# Altium PCB blood pressure.PcbDoc
Units mm, origin at the board's own origin, x right, y up, seen from the top; angles counter-clockwise.
Board outline 80.01 x 100.08 mm, 2 copper layers (Top Layer, Bottom Layer); 44 components, 39 nets, 174 pads, 24 vias.
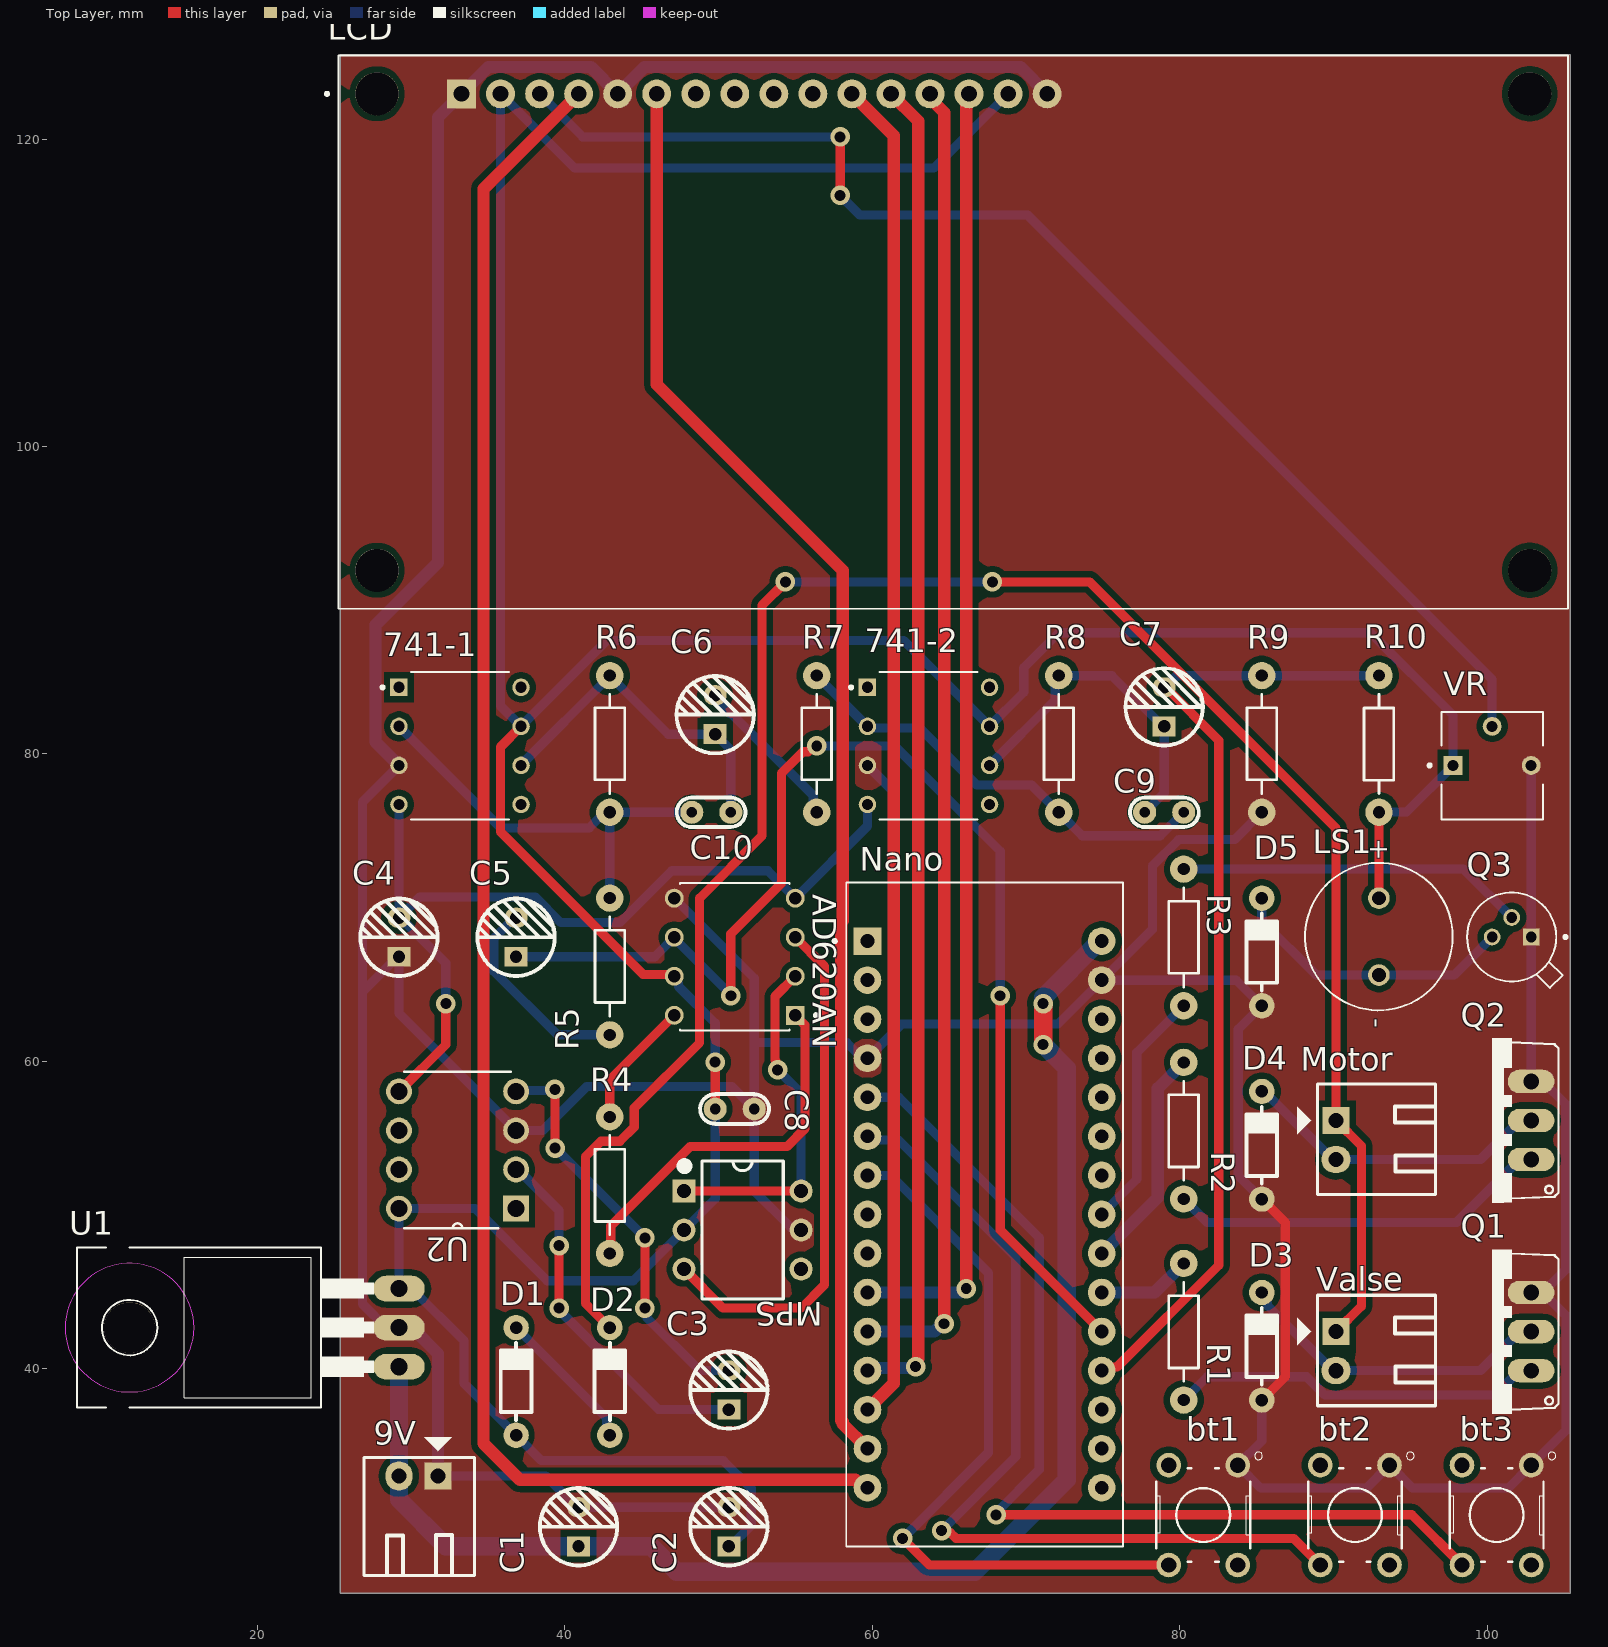
[diagram p0: Top Layer view]
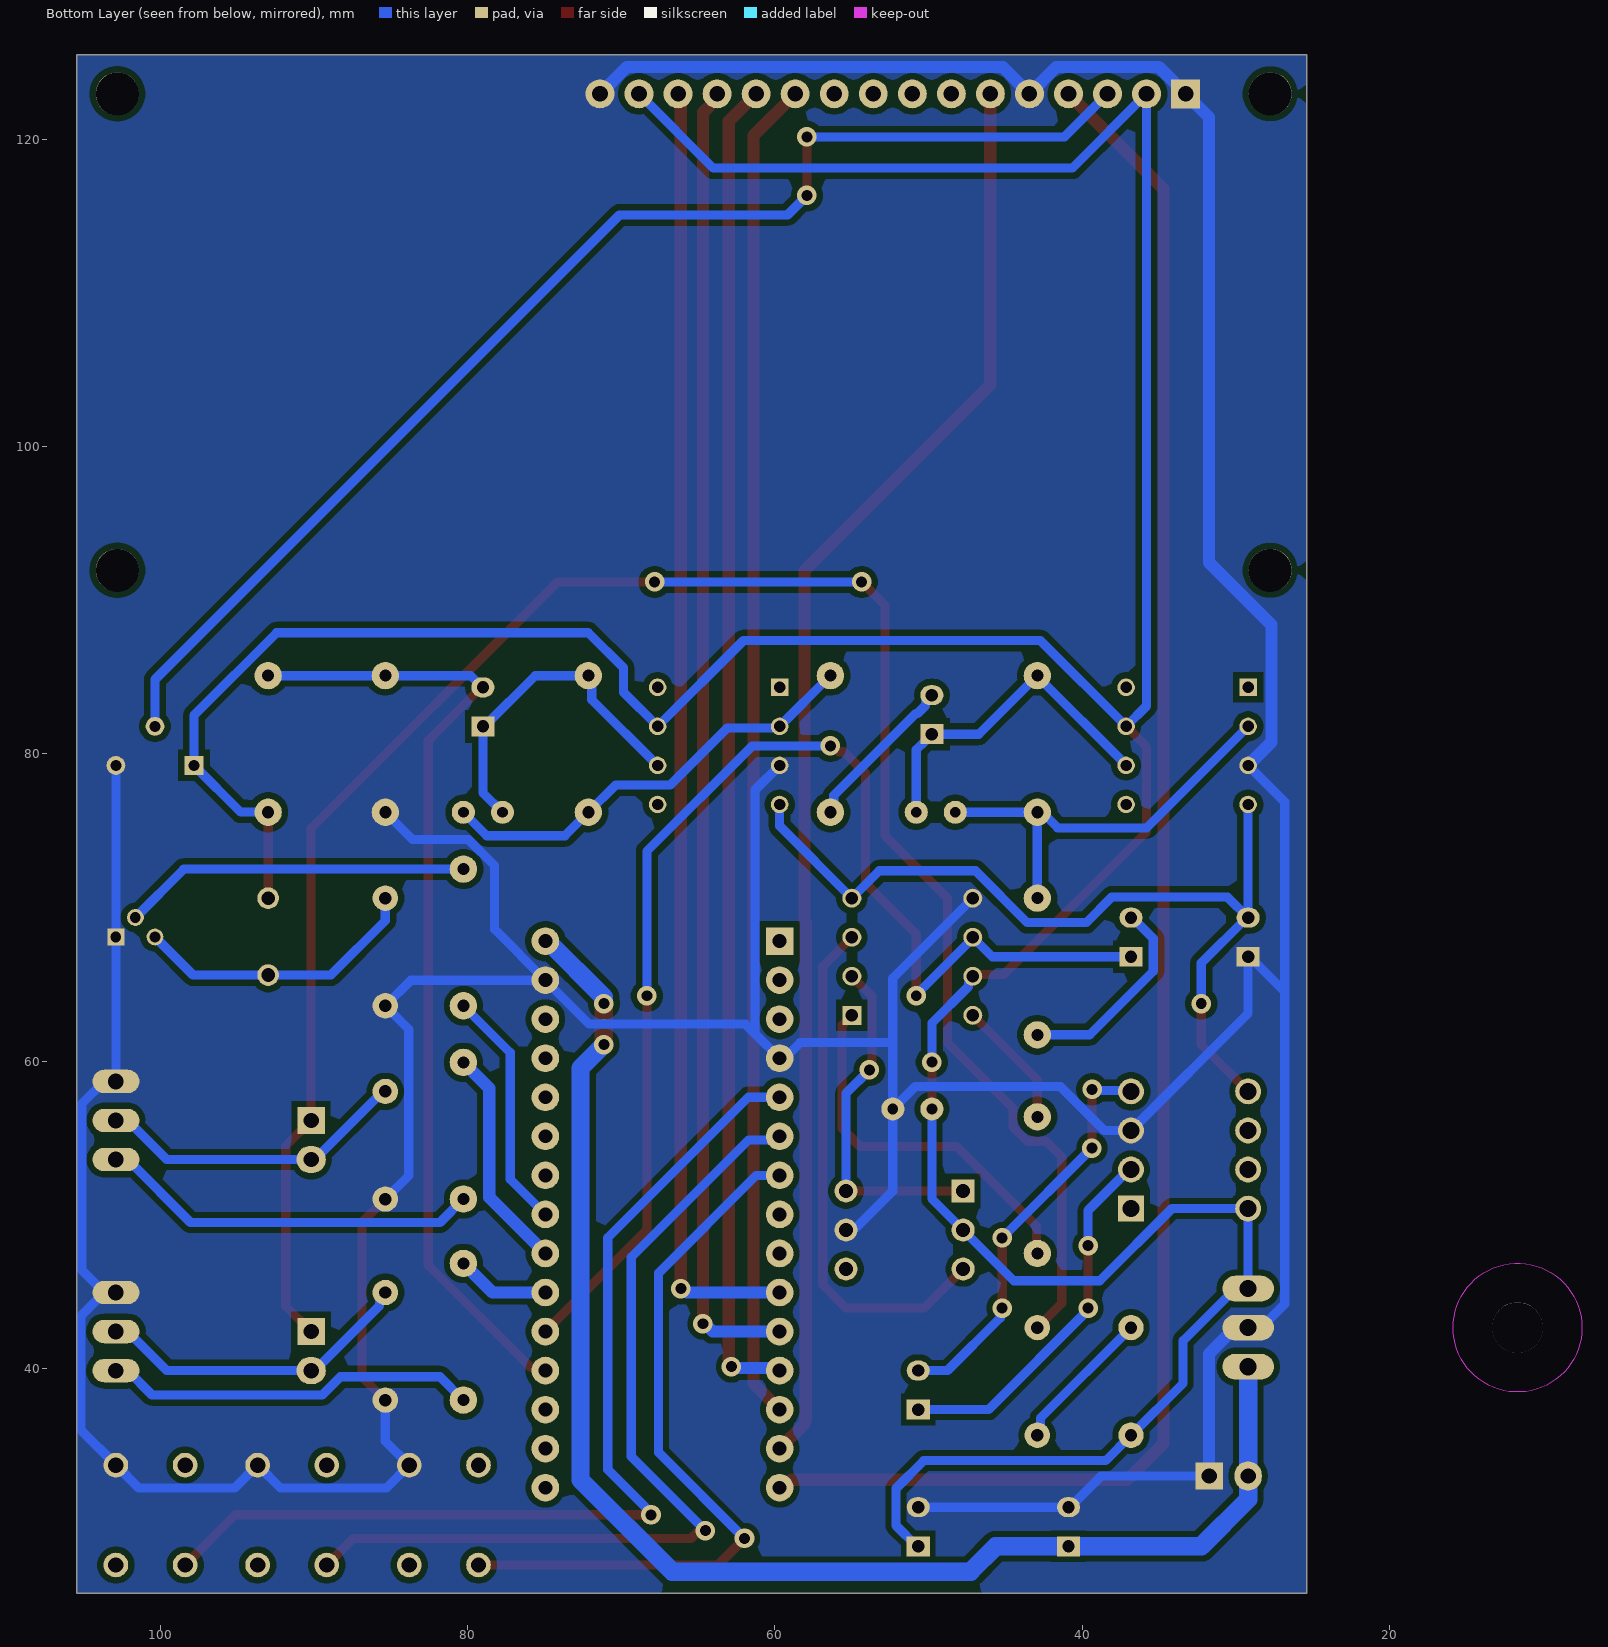
[diagram p1: Bottom Layer view, seen from below]

## Layer stack, top to bottom
Top Solder: solder mask 0.0102, Solder Resist, Dk 3.5
Top Layer: signal copper 0.0356
Dielectric 1: dielectric 0.32, FR-4, Dk 4.8
Bottom Layer: signal copper 0.0356
Bottom Solder: solder mask 0.0102, Solder Resist, Dk 3.5

## Board outline
25.4,25.4 105.41,25.4 105.41,125.476 25.4,125.476

## Design rules (kind name [scope] priority, off if disabled: settings)
Clearance [All] p1: gap=0.4 ignorepadtopadclearanceinfootprint=FALSE
Clearance Clearance_polygon [Inpolygon] p2: gap=0.6 ignorepadtopadclearanceinfootprint=FALSE
HoleSize [All] p1: absolutevalues=TRUE maxlimit=6 minlimit=0.3 maxpercent=80.000 minpercent=20.000
MinimumSolderMaskSliver [All] p1: minsoldermaskwidth=0.1
PolygonConnect [All] p1: connectstyle=Direct reliefconductorwidth=0.254 reliefentries=4 polygonreliefangle="90 Angle" airgapwidth=0.254
RoutingVias [All] p1: holewidth=0.711 width=1.27 viastyle="Through Hole" minholewidth=0.711 minwidth=1.27 maxholewidth=0.711 maxwidth=1.27
SilkToSolderMaskClearance [IsPad] p1: minsilkscreentomaskgap=0.1 clearancetoexposedcopper=TRUE
SolderMaskExpansion [All] p1: expansion=0.102 istentingtop=FALSE
SupplyNets "Schematic Supply Nets_3" [InNet('+5V')] p1: voltage=0.000
SupplyNets "Schematic Supply Nets_2" [InNet('3.6V')] p2: voltage=0.000
SupplyNets "Schematic Supply Nets_1" [InNet('-5')] p3: voltage=0.000
SupplyNets "Schematic Supply Nets" [InNet('GND')] p4: voltage=0.000
Width Width_motor [InNet('motor')] p1: maxlimit=2.54 minlimit=0.8 preferedwidth=1
Width Width_+5V [InNet('+5V')] p2: maxlimit=1.2 minlimit=0.4 preferedwidth=0.6
Width Width_-5V [InNet('-5')] p3: maxlimit=1.2 minlimit=0.4 preferedwidth=0.6
Width Width_9V [InNet('9V')] p4: maxlimit=1.2 minlimit=0.4 preferedwidth=0.6
Width Width_3.6 [InNet('3.6V')] p5: maxlimit=1.2 minlimit=0.4 preferedwidth=0.6
Width Width_valve [InNet('valve')] p6: maxlimit=2.54 minlimit=0.8 preferedwidth=1
Width [All] p7: maxlimit=1.2 minlimit=0.6 preferedwidth=0.8
27 further rules are at their usual default settings.

## Components (designator, comment, footprint, x,y, rotation, side; value= is the part's Value field where it differs from the comment)
9V "IN" "Header 2P DC 2.54" 31.75,33.02 r270 top
741-1 "LM741CN/NOPB" DIP794W45P254L959H508Q8 33.18,80.518 r0 top
741-2 "LM741CN/NOPB" DIP794W45P254L959H508Q8 63.66,80.518 r0 top
AD620AN "AD620AN" DIP787W46P254L1016H533Q8 51.054,66.802 r180 top
bt1 "B3F-1000" SW_B3F-1000 81.534,30.48 r270 top
bt2 "B3F-1000" SW_B3F-1000 91.404,30.48 r270 top
bt3 "B3F-1000" SW_B3F-1000 100.62,30.48 r270 top
C1 "47uF" "tu hoa 5mm" 40.894,29.718 r90 top
C2 "10uF" "tu hoa 5mm" 50.673,29.718 r90 top
C3 "10uF" "tu hoa 5mm" 50.673,38.608 r90 top
C4 "10uF" "tu hoa 5mm" 29.21,68.072 r90 top
C5 "47uF" "tu hoa 5mm" 36.83,68.072 r90 top
C6 "47uF" "tu hoa 5mm" 49.784,82.55 r90 top
C7 "47uF" "tu hoa 5mm" 78.994,83.058 r90 top
C8 "104" "tu gom" 51.054,56.896 r0 top
C9 "33nF" "tu gom" 78.994,76.2 r180 top
C10 "220nF" "tu gom" 49.53,76.2 r0 top
D1 "1N4007" DO-34 36.83,39.172 r270 top
D2 "1N4007" DO-34 42.926,39.172 r270 top
D3 "1N4007" DO-34 85.344,41.458 r270 top
D4 "1N4007" DO-34 85.344,54.539 r270 top
D5 "1N4007" DO-34 85.344,67.112 r270 top
LCD "LCD-16X2" MODULE_LCD-16X2 65.278,107.442 r0 top
LS1 "CX-0905C" CUI_CX-0905C 92.964,68.112 r270 top
Motor "Motor" "Header 2P DC 2.54" 90.17,56.149 r0 top
MPS "Pressure Sensor" DIP-6 51.562,49.022 r0 top
Nano "ARDUINO_NANO" MODULE_ARDUINO_NANO 67.31,50.038 r0 top (schematic designator NANO)
Q1 "TIP41C" TO220AV 100.33,42.418 r90 top
Q2 "TIP41C" TO220AV 100.33,56.149 r90 top
Q3 "2N2222" TO127P580H530-3 101.6,68.087 r180 top
R1 "1k" R1/4W 80.264,46.848 r270 top value="R1/4W - 1K"
R2 "1k" R1/4W 80.264,59.929 r270 top value="R1/4W - 1K"
R3 "4k7" R1/4W 80.264,63.612 r90 top value="R1/4W - 1K"
R4 "470" R1/4W 42.926,56.388 r270 top value="R1/4W - 1K"
R5 "10k" R1/4W 42.926,61.722 r90 top value="R1/4W - 1K"
R6 "120k" R1/4W 42.926,76.2 r90 top value="R1/4W - 1K"
R7 "10k" R1/4W 56.388,76.2 r90 top value="R1/4W - 1K"
R8 "333k" R1/4W 72.136,76.2 r90 top value="R1/4W - 1K"
R9 "47k" R1/4W 85.344,76.2 r90 top value="R1/4W - 1K"
R10 "47k" R1/4W 92.964,85.09 r270 top value="R1/4W - 1K"
U1 "LM7805" TO220 22.86,42.672 r90 top
U2 "ICL7660SIPAZ" DIP254P762X533-8 29.21,58.039 r180 top
Valse "Valve" "Header 2P DC 2.54" 90.17,42.418 r0 top
VR "3362P-1-501LF" TRIM_3362P-1-501LF 100.33,79.248 r0 top

## Footprints (in the part's own frame and the unit in brackets; to place one, negate y for a bottom-side part, rotate by r counter-clockwise, add the part's x,y. Pads: shape width x height; smd on the part's side, far side on the other; paste and mask are expansions set on the pad)
CUI_CX-0905C [mm]
  round 1.408 hole 0.9: N(2.5,0) P(-2.5,0)
  silkscreen extent -4.8,-4.8 4.8,4.8, body extent -4.8,-4.8 4.8,4.8, height 5
DIP254P762X533-8 [mil]
  rect 66x66 / inner round 66 / far side rect 66x66 hole 44: 1(-300,300)
  round 66 hole 44: 2(-300,200) 3(-300,100) 4(-300,0) 5(0,0) 6(0,100) 7(0,200) 8(0,300)
  silkscreen extent -287,-50 -13,350, body extent -156,-189 156,189, height 210
DIP787W46P254L1016H533Q8 [mm]
  rect 1.23x1.23 / inner round 1.23 / far side rect 1.23x1.23 hole 0.82: 1(-3.935,3.81)
  round 1.23 hole 0.82: 2(-3.935,1.27) 3(-3.935,-1.27) 4(-3.935,-3.81) 5(3.935,-3.81) 6(3.935,-1.27) 7(3.935,1.27) 8(3.935,3.81)
  silkscreen extent -5.39,-4.8 3.56,4.8, body extent -4.11,-4.79 4.11,4.79, height 5.33
DIP794W45P254L959H508Q8 [mm]
  rect 1.14x1.14 / inner round 1.14 / far side rect 1.14x1.14 hole 0.74: 1(-3.97,3.81)
  round 1.14 hole 0.74: 2(-3.97,1.27) 3(-3.97,-1.27) 4(-3.97,-3.81) 5(3.97,-3.81) 6(3.97,-1.27) 7(3.97,1.27) 8(3.97,3.81)
  silkscreen extent -5.13,-4.8 3.18,4.8
DIP-6 [mm] "DIP, 14-Pin, Row Spacing 7.62 mm, Pitch 2.54 mm"
  rect 1.5x1.5 hole 0.9: 1(-3.81,2.54)
  round 1.5 hole 0.9: 2(-3.81,0) 3(-3.81,-2.54) 4(3.81,-2.54) 5(3.81,0) 6(3.81,2.54)
  silkscreen extent -3.99,-4.5 2.65,4.5, body extent -5.25,-4.29 5.25,4.27, height 3.1
DO-34 [mm]
  round 1.65 hole 0.81: 1(3.5,0) 2(-3.5,0)
  silkscreen extent -2.5,-1 2.5,1, body extent -3.75,-1 3.75,1, height 2.2
"Header 2P DC 2.54" [mil]
  rect 70x70 hole 39.37: 1(0,0)
  oval 75x70 hole 39.37: 2(0,-100)
  silkscreen extent -100,-190 255,93, body extent -50,-190 250,90, height 237
MODULE_ARDUINO_NANO [mm]
  rect 1.8x1.8 / inner round 1.8 / far side rect 1.8x1.8 hole 0.9: 1(-7.62,17.78)
  round 1.8 hole 0.9: 2(-7.62,15.24) 3(-7.62,12.7) 4(-7.62,10.16) 5(-7.62,7.62) 6(-7.62,5.08) 7(-7.62,2.54) 8(-7.62,0) 9(-7.62,-2.54) 10(-7.62,-5.08) 11(-7.62,-7.62) 12(-7.62,-10.16) 13(-7.62,-12.7) 14(-7.62,-15.24) 15(-7.62,-17.78) 16(7.62,-17.78) 17(7.62,-15.24) 18(7.62,-12.7) 19(7.62,-10.16) 20(7.62,-7.62) 21(7.62,-5.08) 22(7.62,-2.54) 23(7.62,0) 24(7.62,2.54) 25(7.62,5.08) 26(7.62,7.62) 27(7.62,10.16) 28(7.62,12.7) 29(7.62,15.24) 30(7.62,17.78)
  silkscreen extent -9.85,-21.6 9,21.6, body extent -9,-23.4 9,21.6, height 12.6
MODULE_LCD-16X2 [mm]
  rect 1.88x1.88 / inner round 1.88 / far side rect 1.88x1.88 hole 1.016: 1(-32,15.5)
  round 1.88 hole 1.016: 2(-29.46,15.5) 3(-26.92,15.5) 4(-24.38,15.5) 5(-21.84,15.5) 6(-19.3,15.5) 7(-16.76,15.5) 8(-14.22,15.5) 9(-11.68,15.5) 10(-9.14,15.5) 11(-6.6,15.5) 12(-4.06,15.5) 13(-1.52,15.5) 14(1.02,15.5) 15(3.56,15.5) 16(6.1,15.5)
  round 2.8 hole 2.8 unplated: ""(-37.5,-15.5) ""(-37.5,15.5) ""(37.5,-15.5) ""(37.5,15.5)
  silkscreen extent -40.85,-18 40,18, body extent -40,-18 40,18, height 10.2
R1/4W [mil] "R 1/4W, 2 Pin, 350mil"
  round 70 hole 31: 1(0,0) 2(350,0)
  silkscreen extent 48,-38 302,38, body extent -40,-47 386,47, height 111
SW_B3F-1000 [mm]
  round 1.6 hole 1: 1(-3.25,2.25) 2(3.25,2.25) 3(-3.25,-2.25) 4(3.25,-2.25)
  silkscreen extent -4.1,-3.05 3.05,3.85, body extent -3.85,-3 3.85,3, height 4.3
TO127P580H530-3 [mm]
  rect 1.09x1.09 / inner round 1.09 / far side rect 1.09x1.09 hole 0.69: 1(-1.27,0)
  round 1.09 hole 0.69: 2(0,-1.27) 3(1.27,0)
  silkscreen extent -3.6,-2.9 2.9,3.31, body extent -3.27,-2.9 2.9,3.27, height 18
TO220 [mil]
  oval 66x132 hole 44: 1(-100,-250) 2(0,-250) 3(100,-250)
  round 130 hole 130 unplated: ""(0,440)
  Keep-Out Layer circle w0: c0,440 r165
  Keep-Out Layer circle w0: c0,440 r165
  silkscreen extent -205,-185 205,575, body extent -200,-68 200,113, height 1155
TO220AV [mil]
  oval 60x120 hole 40: B(-100,-100) C(0,-100) E(100,-100)
  silkscreen extent -210,-170 210,0, body extent -203,-90 203,90, height 875
TRIM_3362P-1-501LF [mm]
  rect 1.222x1.222 / inner round 1.222 / far side rect 1.222x1.222 hole 0.714: 1(-2.54,0)
  round 1.222 hole 0.714: 2(0,2.54) 3(2.54,0)
  silkscreen extent -4.16,-3.53 3.3,3.47, body extent -3.3,-3.49 3.3,3.49, height 4.88
"tu gom" [mm] "Tu gom mini"
  round 1.5 hole 0.7: 1(-1.27,0) 2(1.27,0)
  silkscreen extent -2.25,-0.97 2.22,0.97, body extent -2.92,-0.85 2.92,0.85, height 6.12
"tu hoa 5mm" [mm]
  rect 1.3x1.5 hole 0.8: 1(-1.27,0)
  oval 1.3x1.5 hole 0.8: 2(1.27,0)
  silkscreen extent -2.51,-2.51 2.51,2.51, body extent -3.12,-3.18 3.23,3.18, height 14.55

## Part data
9V Motor Valse: library part "Header 2P 2.54 Duc Cong", "Cắm", Chung_Loai=Cắm, Don_Vi=Con, Ma_Hang=MH002852, Ten_Linh_Kien="Header 2P XH2.54-2P Đực Cong"
741-1 741-2: Package=None, Availability=Unavailable, MF="{'manufacturer': u'Texas Instruments'}", MP=LM741CN/NOPB, Price=None
AD620AN: "Instrumentation Amplifier 1 Circuit - 8-PDIP", Package="PDIP-8 Analog Devices", Check_prices=https://www.snapeda.com/parts/AD620AN/Analog+Devices/view-part/?ref=eda, MF="Analog Devices", MP=AD620AN, SnapEDA_Link=https://www.snapeda.com/parts/AD620AN/Analog+Devices/view-part/?ref=snap
bt1 bt2 bt3: "Tactile Switch SPST-NO Top Actuated Through Hole", Package=None, Availability="In Stock", Check_prices=https://www.snapeda.com/parts/B3F-1000/Omron+Electronics+Inc-EMC+Div/view-part/?ref=eda, MF=Omron, MP=B3F-1000, Price=None, Purchase-URL=https://pricing.snapeda.com/search/part/B3F-1000/?ref=eda, SnapEDA_Link=https://www.snapeda.com/parts/B3F-1000/Omron+Electronics+Inc-EMC+Div/view-part/?ref=snap
C1 C2 C3 C4 C5 C6 C7: library part "Tu Hoa 47uF 25V 5x8", "Cắm", Chung_Loai=Cắm, Don_Vi=Con, Ma_Hang=MH006860, So_Chan=2, Ten_Linh_Kien="Tụ Hóa 47uF 25V"
C8 C9 C10: library part "Tu gom 103 50V", "Cắm", Chung_Loai=Cắm, Don_Vi=Con, Ma_Hang=MH000936, So_Chan=2, Ten_Linh_Kien="Tụ gốm 103 10nF 50V"
D1 D2 D3 D4 D5: library part "Diode Standard", "Diode Standard", Part Number="LED 3 ly Single Colour"
LCD: "Display Development Tools 16x2 Black on Green Char LCD w Backlight", Package=None, Check_prices=https://www.snapeda.com/parts/LCD-16X2/Gravitech/view-part/?ref=eda, MF=Gravitech, MP=LCD-16X2, SnapEDA_Link=https://www.snapeda.com/parts/LCD-16X2/Gravitech/view-part/?ref=snap
LS1: "9,6 Ð¼Ð¼, 5 Ð’, 80 Ð´Ð‘, 2,7 ÐºÐ“Ñ†, ÑÐºÐ²Ð¾Ð·Ð½Ð¾Ðµ Ð¾Ñ‚Ð²ÐµÑ€ÑÑ‚Ð¸Ðµ, Ð³ÐµÑ€Ð¼ÐµÑ‚Ð¸Ñ‡Ð½Ñ‹Ð¹, Ñ Ñ†ÐµÐ¿ÑŒÑŽ ÑƒÐ¿Ñ€Ð°Ð²Ð»ÐµÐ½Ð¸Ñ, Ð¼Ð°Ð³Ð½Ð¸Ñ‚Ð½Ñ‹Ð¹ Ð·Ð²ÑƒÐºÐ¾Ð²Ð¾Ð¹ Ð¸Ð½Ð´Ð¸ÐºÐ°Ñ‚Ð¾Ñ€", Package=None, Check_prices=https://www.snapeda.com/parts/CX-0905C/Same+Sky/view-part/?ref=eda, MF="Same Sky", MP=CX-0905C, SnapEDA_Link=https://www.snapeda.com/parts/CX-0905C/Same+Sky/view-part/?ref=snap
MPS: library part MPS20N0040D-S, "Designed By @Alixahedi"
Nano: "Small, complete, and breadboard-friendly board based on the ATmega328 (Arduino Nano 3.x)", Package="Non-Standard Arduino", Check_prices=https://www.snapeda.com/parts/Arduino%20Nano/Arduino/view-part/?ref=eda, MF=Arduino, MP="Arduino Nano", SnapEDA_Link=https://www.snapeda.com/parts/Arduino%20Nano/Arduino/view-part/?ref=snap
Q1 Q2: "Bipolar (BJT) Transistor NPN 100V 6A 3MHz 65W Through Hole TO-220-3", Package="TO-220-3 Central Semiconductor", Check_prices=https://www.snapeda.com/parts/TIP41C/Central+Components+Manufacturing/view-part/?ref=eda, MF="Central Semiconductor", MP=TIP41C, SnapEDA_Link=https://www.snapeda.com/parts/TIP41C/Central+Components+Manufacturing/view-part/?ref=snap
Q3: "Bipolar (BJT) Transistor NPN 30 V 600 mA 250MHz 500 mW Through Hole TO-18", Package="TO-18 Texas Instruments", Check_prices=https://www.snapeda.com/parts/2N2222/STMicroelectronics/view-part/?ref=eda, MF=STMicroelectronics, MP=2N2222, SnapEDA_Link=https://www.snapeda.com/parts/2N2222/STMicroelectronics/view-part/?ref=snap
R1 R2 R3 R4 R5 R6 R7 R8 R9 R10: library part Res, "Resistor 1/4W"
U1: "Linear Voltage Regulator IC Positive Fixed 1 Output 1.5A DDPAK/TO-263-3", Package=None, Availability="In Stock", Check_prices=https://www.snapeda.com/parts/LM7805/Texas+Instruments/view-part/?ref=eda, MF="Texas Instruments", MP=LM7805, Price=None, Purchase-URL=https://pricing.snapeda.com/search/part/LM7805/?ref=eda, SnapEDA_Link=https://www.snapeda.com/parts/LM7805/Texas+Instruments/view-part/?ref=snap
U2: "Charge Pump Switching Regulator IC Positive or Negative Fixed -Vin, 2Vin 1 Output 45mA 8-DIP (0.300, 7.62mm)", Package="DIP-8 Renesas / Intersil", Check_prices=https://www.snapeda.com/parts/ICL7660SIPAZ/Renesas/view-part/?ref=eda, MF="Renesas Electronics America Inc", MP=ICL7660SIPAZ, SnapEDA_Link=https://www.snapeda.com/parts/ICL7660SIPAZ/Renesas/view-part/?ref=snap
VR: "1/4 Sq, Thru-Hole, TRIMMER, 50 ohms, Cermet, Single Turn", Package="3362P-1 Bourns Inc.", Check_prices=https://www.snapeda.com/parts/3362P-1-501LF/Bourns/view-part/?ref=eda, MF=Bourns, MP=3362P-1-501LF, SnapEDA_Link=https://www.snapeda.com/parts/3362P-1-501LF/Bourns/view-part/?ref=snap

## Via types
v1: diameter 1.27, hole 0.711, Top Layer to Bottom Layer, 24 vias

## Nets (pads, with @x,y where several pads share a name; then routed paths per layer and width w, separated by ;. In a path a pad name is that pad's centre, name@x,y a point inside that pad or via, vN(x,y) a via of type N, cw(c..) or ccw(c..) an arc to the next point about the centre after c; other vN are vias at no path point)
3.6V: D2.2 Motor.1 Valse.1 | length 131.8
  Top Layer w0.6: D2.2 41.337,44.261 41.337,53.783 42.353,54.799 43.584,54.799 44.515,55.73 44.515,56.961 48.768,61.214 48.768,70.612 52.832,74.676 52.832,89.662 v1(54.356,91.186) ; v1(67.818,91.186) 74.145,91.186 90.17,75.161 Motor.1 91.822,54.496 91.822,44.07 Valse.1
  Bottom Layer w0.6: v1(54.356,91.186) v1(67.818,91.186)
9V: 9V.2 C1.1 Nano.30 U1.1 | length 93.8
  Top Layer w1.2: v1(71.12,61.084) v1(71.12,63.754)
  Bottom Layer w1.2: U1.1 9V.2 29.21,31.496 32.258,28.448 C1.1 45.616,28.448 47.266,26.798 66.676,26.798 72.644,32.766 72.644,59.56 v1(71.12,61.084) ; v1(71.12,63.754) 71.133,63.767 71.133,64.168 74.783,67.818 Nano.30
+5V: 741-1.7 741-2.7 AD620AN.7 C2.1 C8.1 D1.1 LCD.2 LCD.15 LS1.P MPS.2 R10.2 U1.3 U2.8 VR.1 | length 267.1
  Top Layer w0.6: 741-1.7 35.814,80.452 35.814,74.93 45.091,65.653 46.998,65.653 AD620AN.7 ; C8.1 v1(49.784,59.944) ; LS1.P R10.2
  Bottom Layer w0.6: AD620AN.7 47.119,65.362 47.399,65.082 47.399,64.869 49.784,62.484 v1(49.784,59.944) ; C8.1 49.784,51.054 44.45,45.72 38.863,45.72 34.164,50.419 U2.8 U1.3 30.048,45.212 33.442,41.819 33.442,39.06 D1.1 38.482,34.02 50.308,34.02 52.123,32.205 52.123,29.798 50.773,28.448 C2.1 ; LCD.15 64.006,118.11 40.65,118.11 LCD.2 35.818,83.12 741-1.7 42.738,87.376 62.042,87.376 741-2.7 69.85,84.008 69.85,85.598 72.136,87.884 92.417,87.884 97.79,82.511 VR.1 94.753,76.211 92.975,76.211 R10.2
-5: 741-1.4 741-2.4 AD620AN.4 C4.2 U2.5 | length 58.5
  Top Layer w0.6: U2.5 32.258,61.087 v1(32.258,63.754)
  Bottom Layer w0.6: 741-1.4 C4.2 ; v1(32.258,63.754) 32.258,66.394 29.31,69.342 C4.2 ; 741-2.4 59.69,75.313 AD620AN.4 53.211,72.39 46.951,72.39 43.584,69.023 39.745,69.023 38.076,70.692 30.56,70.692 C4.2
D2: bt3.4 Nano.5 | length 65.8
  Top Layer w0.6: v1(68.059,30.493) 95.107,30.493 bt3.4
  Bottom Layer w0.6: Nano.5 61.722,57.658 70.866,48.514 70.866,33.445 68.059,30.638 v1(68.059,30.493)
D3: bt2.4 Nano.6 | length 58.3
  Top Layer w0.6: v1(64.516,29.464) 64.644,29.336 65.077,29.336 65.456,28.956 87.428,28.956 bt2.4
  Bottom Layer w0.6: Nano.6 59.92,54.888 61.698,54.888 69.342,47.244 69.342,34.29 v1(64.516,29.464)
D4: bt1.4 Nano.7 | length 48.1
  Top Layer w0.6: v1(61.976,28.956) 63.702,27.23 bt1.4
  Bottom Layer w0.6: Nano.7 61.214,52.578 67.564,46.228 67.564,34.544 v1(61.976,28.956)
GND: 9V.1 741-1.3 741-2.3 AD620AN.5 bt1.1 bt2.1 bt3.1 C1.2 C2.2 C4.1 C8.2 D3.1 D4.1 D5.1 LCD.1 LCD.5 LCD.16 MPS.5 Nano.4 Nano.29 Q1.E Q2.E Q3.1 R9.1 U1.2 U2.3 VR.3 | length 394.5
  Top Layer w0.6: D3.1 86.869,39.483 86.869,49.514 D4.1
  Bottom Layer w0.6: U1.2 28.372,42.672 26.834,44.21 26.834,64.526 ; 741-1.3 26.834,76.872 26.834,64.526 ; 9V.1 38.762,33.02 40.794,30.988 C1.2 C2.2 ; AD620AN.5 52.324,65.407 52.324,61.214 ; MPS.5 55.2,49.194 54.692,49.194 52.324,51.562 C8.2 ; 741-2.3 61.29,77.648 61.29,61.798 ; D3.1 85.344,35.29 bt1.1 85.284,32.23 92.154,32.23 bt2.1 95.154,32.23 101.37,32.23 bt3.1 105.156,36.016 105.156,43.434 Q1.E@103.632,44.958 ; D4.1 83.819,52.564 83.819,62.087 D5.1 83.678,65.278 Nano.29 ; R9.1 83.566,74.422 79.937,74.422 78.232,72.717 78.232,68.58 Nano.29 ; Q1.E Q1.E@103.632,44.958 ; VR.3 Q3.1 Q2.E 103.632,58.689 105.094,57.227 105.094,46.42 Q1.E@103.632,44.958 ; 26.834,64.526 29.11,66.802 C4.1 29.21,63.119 U2.3 38.569,55.499 41.425,58.355 50.865,58.355 C8.2 ; C8.2 52.324,61.214 ; 52.324,61.214 58.349,61.214 59.365,60.198 Nano.4 61.29,61.798 ; 61.29,61.798 61.911,62.419 72.071,62.419 Nano.29
  Bottom Layer w0.8: U1.2 30.048,42.672 31.75,40.97 9V.1 ; 741-1.3 27.686,80.772 27.686,88.392 31.75,92.456 31.75,121.414 LCD.1 ; LCD.1@33.02,122.684 35.018,124.682 41.698,124.682 LCD.5 45.178,124.682 69.638,124.682 LCD.16
motor: Nano.22 R2.1 | length 14.6
  Bottom Layer w0.8: Nano.22 78.575,51.143 78.575,58.24 R2.1
Net741-1_2: 741-1.2 C10.1 R5.2 R6.1 | length 27.8
  Bottom Layer w0.6: 741-1.2 35.814,75.184 41.591,75.184 42.607,76.2 R6.1 ; R5.2 R6.1 ; C10.1 R6.1
Net741-1_6: 741-1.6 C6.1 C10.2 R6.2 | length 22.2
  Bottom Layer w0.6: 741-1.6 37.15,79.281 42.926,85.057 R6.2 46.736,81.28 49.884,81.28 50.234,80.93 50.234,80.83 50.8,80.264 C10.2
Net741-2_2: 741-2.2 C9.1 R7.2 R8.1 | length 28.8
  Bottom Layer w0.6: R7.2 59.793,81.685 63.095,81.685 66.802,77.978 70.358,77.978 R8.1 73.66,74.676 78.74,74.676 C9.1
Net741-2_6: 741-2.6 C7.1 C9.2 R8.2 | length 22
  Bottom Layer w0.6: 741-2.6 71.911,83.529 71.911,84.865 R8.2 75.592,85.09 78.894,81.788 C7.1 78.994,77.47 C9.2
NetAD620AN_1: AD620AN.1 R4.2 | length 24.7
  Top Layer w0.6: R4.2 42.987,47.559 42.987,49.287 48.161,54.461 54.461,54.461 55.626,55.626 55.626,62.355 AD620AN.1
NetAD620AN_2: AD620AN.2 MPS.1 MPS.6 | length 22.8
  Top Layer w0.6: MPS.1 MPS.6 ; v1(53.848,59.436) 53.72,59.564 53.72,60.038 53.674,60.084 53.674,64.217 AD620AN.2
  Bottom Layer w0.6: v1(53.848,59.436) 55.372,57.912 MPS.6
NetAD620AN_3: AD620AN.3 MPS.3 | length 34.2
  Top Layer w0.6: MPS.3 50.292,43.942 55.372,43.942 56.89,45.46 56.89,66.171 AD620AN.3
NetAD620AN_6: AD620AN.6 C5.1 Nano.20 | length 83.8
  Top Layer w0.6: v1(50.8,64.262) 50.8,68.283 54.102,71.585 54.102,78.74 55.498,80.136 55.825,80.136 56.207,80.518 v1(56.388,80.518) ; v1(68.326,64.262) 68.326,49.022 Nano.20
  Bottom Layer w0.6: C5.1 45.849,66.802 AD620AN.6 47.119,68.007 50.8,64.327 v1(50.8,64.262) ; v1(56.388,80.518) 61.468,80.518 68.326,73.66 v1(68.326,64.262)
NetAD620AN_8: AD620AN.8 R4.1 | length 8.3
  Top Layer w0.6: R4.1 42.926,58.799 AD620AN.8
NetC3_1: C3.1 U2.2 | length 24.1
  Top Layer w0.6: v1(39.624,43.942) v1(39.624,48.006)
  Bottom Layer w0.6: U2.2 36.956,52.959 39.624,50.291 v1(39.624,48.006) ; v1(39.624,43.942) 39.624,43.817 46.103,37.338 C3.1
NetC3_2: C3.2 U2.4 | length 26.7
  Top Layer w0.6: v1(39.359,58.177) 39.365,58.171 39.365,54.361 v1(39.37,54.356) ; v1(45.212,43.942) v1(45.212,48.514)
  Bottom Layer w0.6: U2.4 36.899,58.108 39.29,58.108 v1(39.359,58.177) ; v1(39.37,54.356) v1(45.212,48.514) ; v1(45.212,43.942) 45.34,43.814 45.34,43.306 48.768,39.878 C3.2
NetC5_2: C5.2 R5.1 | length 13.4
  Bottom Layer w0.6: C5.2 36.73,69.342 35.38,67.992 35.38,65.862 39.52,61.722 R5.1
NetC6_2: C6.2 R7.1 | length 10.4
  Bottom Layer w0.6: C6.2 49.784,83.731 50.203,83.312 50.203,83.147 50.72,82.63 50.824,82.63 56.163,77.291 56.163,76.425 R7.1
NetC7_2: C7.2 Nano.19 R9.2 R10.1 | length 63.9
  Top Layer w0.6: Nano.19 75.16,40.108 75.922,40.108 82.55,46.736 82.55,80.872 79.094,84.328 C7.2
  Bottom Layer w0.6: C7.2 79.033,84.328 79.795,85.09 R10.1
NetD1_2: D1.2 D2.1 | length 9.5
  Bottom Layer w0.6: D1.2 42.725,36.777 42.725,35.873 D2.1
NetD3_2: D3.2 Q1.C Valse.2 | length 21
  Bottom Layer w0.6: D3.2 85.344,44.674 85.723,44.295 85.723,44.097 89.942,39.878 Valse.2 99.568,39.878 102.108,42.418 Q1.C
NetD4_2: D4.2 Motor.2 Q2.C | length 20.4
  Bottom Layer w0.6: D4.2 85.51,58.039 89.94,53.609 Motor.2 99.568,53.609 102.108,56.149 Q2.C
NetD5_2: D5.2 LS1.N Q3.3 | length 18.9
  Bottom Layer w0.6: D5.2 85.344,69.153 88.885,65.612 97.855,65.612 Q3.3
NetLCD_3: LCD.3 VR.2 | length 83
  Top Layer w0.6: v1(57.912,116.332) v1(57.912,120.142)
  Bottom Layer w0.6: LCD.3 41.158,120.142 v1(57.912,120.142) ; v1(57.912,116.332) 59.182,115.062 70.104,115.062 100.33,84.836 VR.2
NetLCD_4: LCD.4 Nano.15 | length 116.5
  Top Layer w0.8: LCD.4 34.714,116.758 34.714,35.136 37.084,32.766 58.911,32.766 59.419,32.258 Nano.15
NetLCD_6: LCD.6 Nano.14 | length 93.9
  Top Layer w0.8: LCD.6 45.978,104.033 58.077,91.934 58.077,69.136 57.99,69.049 57.99,66.627 57.99,36.634 58.077,36.547 58.077,36.411 Nano.14
NetLCD_11: LCD.11 Nano.13 | length 87.4
  Top Layer w0.8: LCD.11 61.39,120.23 61.39,39.038 Nano.13
NetLCD_12: LCD.12 Nano.12 | length 86.9
  Top Layer w0.8: LCD.12 62.992,121.168 62.992,40.631 62.915,40.554 62.915,40.222 v1(62.825,40.132)
  Bottom Layer w0.8: Nano.12 59.854,40.042 62.735,40.042 v1(62.825,40.132)
NetLCD_13: LCD.13 Nano.11 | length 85.6
  Top Layer w0.8: LCD.13 63.758,122.65 64.681,121.727 v1(64.681,42.926)
  Bottom Layer w0.8: Nano.11 64.046,42.418 64.554,42.926 v1(64.681,42.926)
NetLCD_14: LCD.14 Nano.10 | length 84.3
  Top Layer w0.8: v1(66.116,45.212) 66.116,122.76 LCD.14
  Bottom Layer w0.8: Nano.10 65.735,44.958 65.989,45.212 v1(66.116,45.212)
NetQ1_B: Q1.B R1.2 | length 24.4
  Bottom Layer w0.6: R1.2 81.789,39.483 88.254,39.483 89.448,38.289 100.519,38.289 102.108,39.878 Q1.B
NetQ2_B: Q2.B R2.2 | length 24.9
  Bottom Layer w0.6: R2.2 81.789,49.514 98.013,49.514 102.108,53.609 Q2.B
NetQ3_2: Q3.2 R3.2 | length 22.6
  Bottom Layer w0.6: R3.2 98.455,72.502 Q3.2
speaker: Nano.23 R3.1 | length 15.8
  Bottom Layer w0.6: Nano.23 77.216,52.324 77.216,60.564 R3.1
valve: Nano.21 R1.1 | length 6.1
  Bottom Layer w0.8: Nano.21 78.374,44.958 R1.1
pads on no net: 741-1.1 741-1.5 741-1.8 741-2.1 741-2.5 741-2.8 bt1.2 bt1.3 bt2.2 bt2.3 bt3.2 bt3.3 LCD. LCD.7 LCD.8 LCD.9 LCD.10 MPS.4 Nano.1 Nano.2 Nano.3 Nano.8 Nano.9 Nano.16 Nano.17 Nano.18 Nano.24 Nano.25 Nano.26 Nano.27 Nano.28 U1. U2.1 U2.6 U2.7

## Polygon pours and split planes (outlines as drawn)
GND on Bottom Layer "GND_L02_P000" (solid, remove dead copper, pour order 0): 25.4,125.476 25.4,25.4 105.41,25.4 105.41,125.476
GND on Top Layer "GND_L01_P001" (solid, remove dead copper, pour order 1): 25.4,125.476 25.4,25.4 105.41,25.4 105.41,125.476

## Text inside footprints (layer, text, board x,y; h text height)
LS1: Top Overlay "+" at 92.392,74.504 h1.27 r270; Top Overlay "-" at 92.265,62.798 h1.27 r270
U1: Mechanical 13 "3" at 22.86,44.577 h1.27 r90; Mechanical 13 "2" at 22.86,42.036 h1.27 r90; Mechanical 13 "1" at 22.86,39.491 h1.27 r90